# EAGLE board RN-52 Breakout-GiantPanel (EAGLE 6.4), part 1 of 5
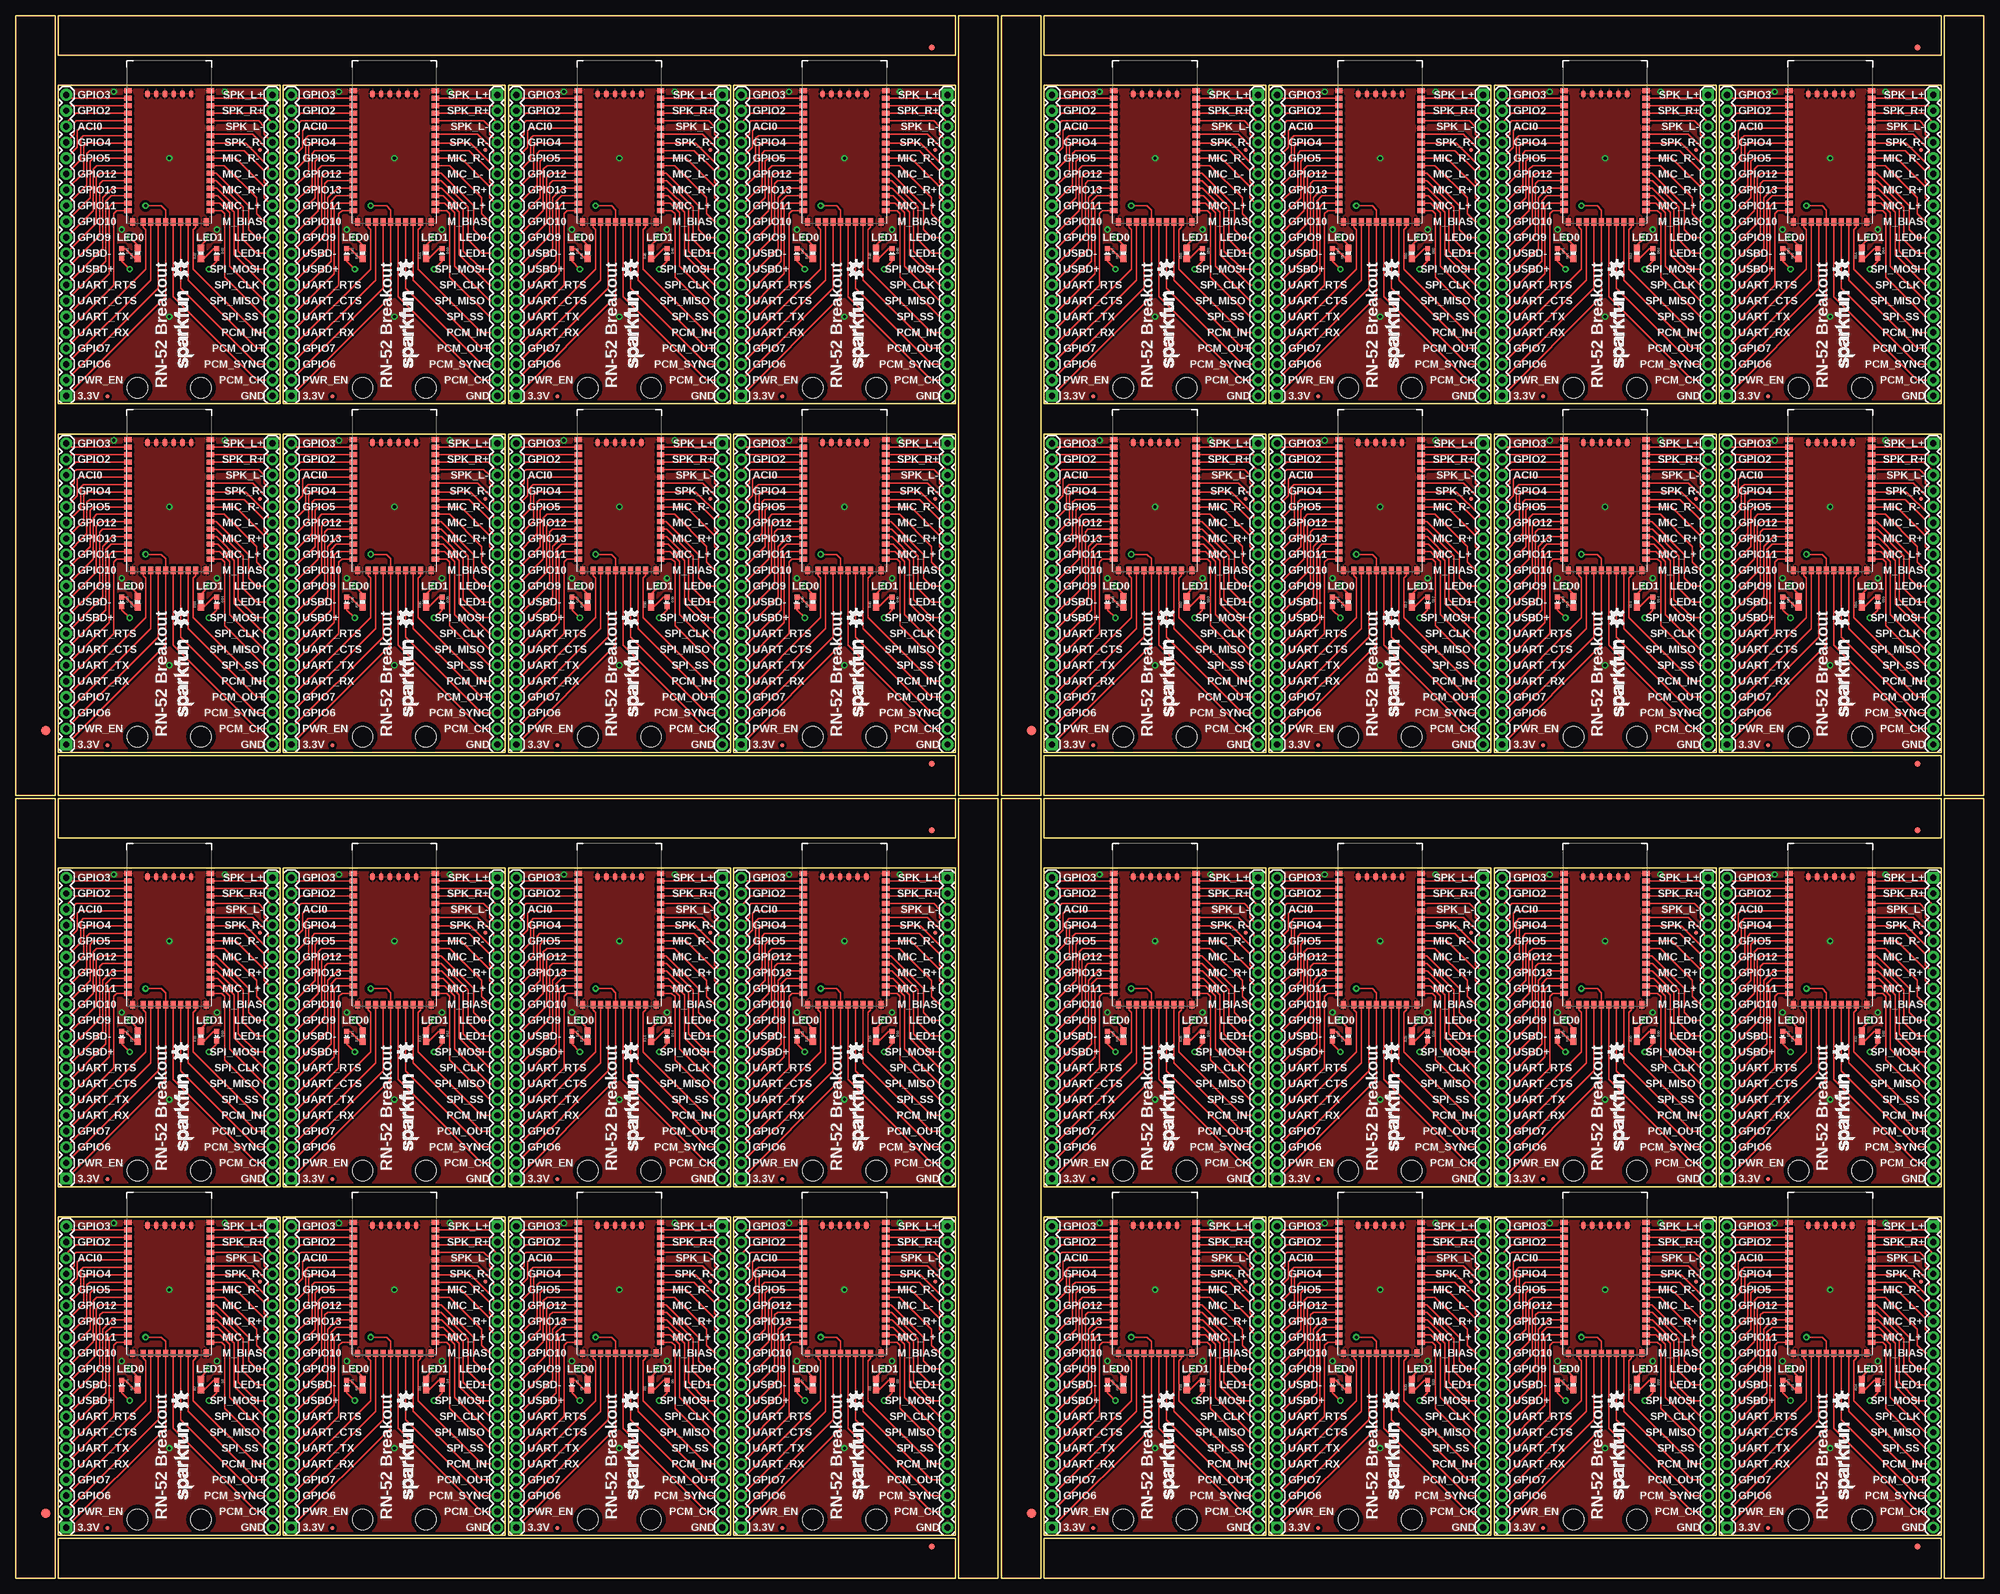
[diagram p0: board, top side]
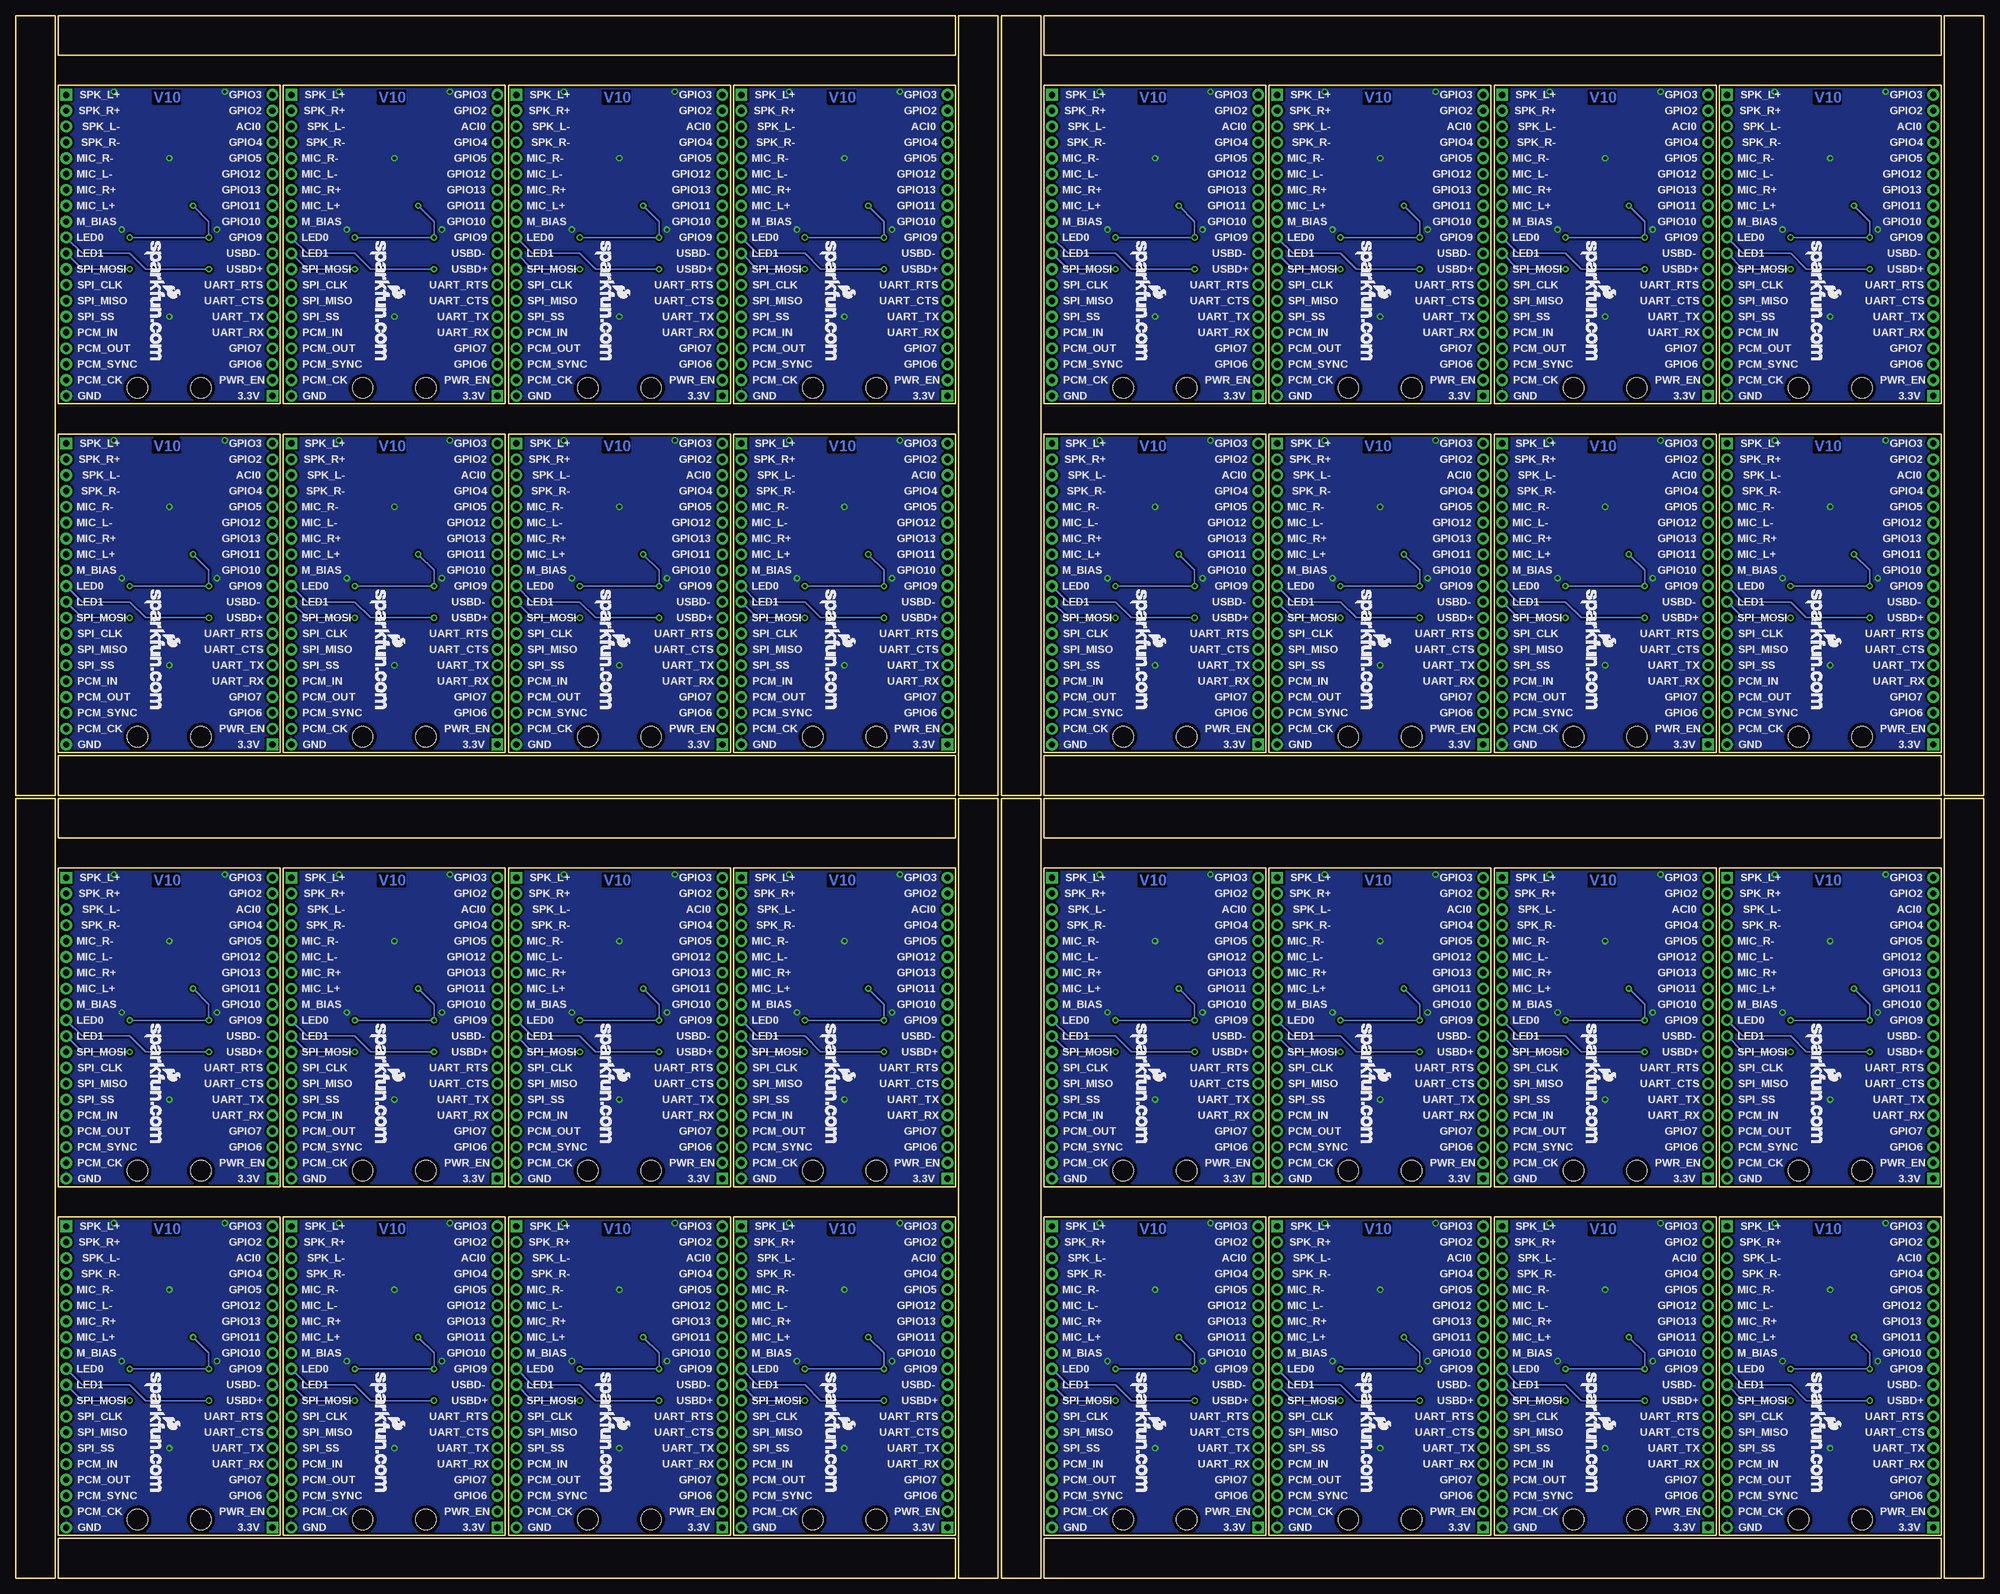
[diagram p1: board, bottom side, seen from below]

Size 315.47 x 250.44 mm. Coordinates in mm from the lower left corner, seen from the top.
Outline: 6.86,57.91 42.42,57.91 42.42,6.86 6.86,6.86 6.86,57.91
Outline: 42.93,57.91 78.49,57.91 78.49,6.86 42.93,6.86 42.93,57.91
Outline: 78.99,57.91 114.55,57.91 114.55,6.86 78.99,6.86 78.99,57.91
Outline: 115.06,57.91 150.62,57.91 150.62,6.86 115.06,6.86 115.06,57.91
Outline: 6.86,113.79 42.42,113.79 42.42,62.74 6.86,62.74 6.86,113.79
Outline: 42.93,113.79 78.49,113.79 78.49,62.74 42.93,62.74 42.93,113.79
Outline: 78.99,113.79 114.55,113.79 114.55,62.74 78.99,62.74 78.99,113.79
Outline: 115.06,113.79 150.62,113.79 150.62,62.74 115.06,62.74 115.06,113.79
Outline: 6.35,0 6.35,124.97 0,124.97 0,0 6.35,0
Outline: 6.86,0 150.62,0 150.62,6.35 6.86,6.35 6.86,0
Outline: 157.48,0 157.48,124.97 151.13,124.97 151.13,0 157.48,0
Outline: 6.86,118.62 150.62,118.62 150.62,124.97 6.86,124.97 6.86,118.62
Outline: 164.85,57.91 200.41,57.91 200.41,6.86 164.85,6.86 164.85,57.91
Outline: 200.91,57.91 236.47,57.91 236.47,6.86 200.91,6.86 200.91,57.91
Outline: 236.98,57.91 272.54,57.91 272.54,6.86 236.98,6.86 236.98,57.91
Outline: 273.05,57.91 308.61,57.91 308.61,6.86 273.05,6.86 273.05,57.91
Outline: 164.85,113.79 200.41,113.79 200.41,62.74 164.85,62.74 164.85,113.79
Outline: 200.91,113.79 236.47,113.79 236.47,62.74 200.91,62.74 200.91,113.79
Outline: 236.98,113.79 272.54,113.79 272.54,62.74 236.98,62.74 236.98,113.79
Outline: 273.05,113.79 308.61,113.79 308.61,62.74 273.05,62.74 273.05,113.79
Outline: 164.34,0 164.34,124.97 157.99,124.97 157.99,0 164.34,0
Outline: 164.85,0 308.61,0 308.61,6.35 164.85,6.35 164.85,0
Outline: 315.47,0 315.47,124.97 309.12,124.97 309.12,0 315.47,0
Outline: 164.85,118.62 308.61,118.62 308.61,124.97 164.85,124.97 164.85,118.62
Outline: 6.86,183.39 42.42,183.39 42.42,132.33 6.86,132.33 6.86,183.39
Outline: 42.93,183.39 78.49,183.39 78.49,132.33 42.93,132.33 42.93,183.39
Outline: 78.99,183.39 114.55,183.39 114.55,132.33 78.99,132.33 78.99,183.39
Outline: 115.06,183.39 150.62,183.39 150.62,132.33 115.06,132.33 115.06,183.39
Outline: 6.86,239.27 42.42,239.27 42.42,188.21 6.86,188.21 6.86,239.27
Outline: 42.93,239.27 78.49,239.27 78.49,188.21 42.93,188.21 42.93,239.27
Outline: 78.99,239.27 114.55,239.27 114.55,188.21 78.99,188.21 78.99,239.27
Outline: 115.06,239.27 150.62,239.27 150.62,188.21 115.06,188.21 115.06,239.27
Outline: 6.35,125.48 6.35,250.44 0,250.44 0,125.48 6.35,125.48
Outline: 6.86,125.48 150.62,125.48 150.62,131.83 6.86,131.83 6.86,125.48
Outline: 157.48,125.48 157.48,250.44 151.13,250.44 151.13,125.48 157.48,125.48
Outline: 6.86,244.09 150.62,244.09 150.62,250.44 6.86,250.44 6.86,244.09
Outline: 164.85,183.39 200.41,183.39 200.41,132.33 164.85,132.33 164.85,183.39
Outline: 200.91,183.39 236.47,183.39 236.47,132.33 200.91,132.33 200.91,183.39
Outline: 236.98,183.39 272.54,183.39 272.54,132.33 236.98,132.33 236.98,183.39
Outline: 273.05,183.39 308.61,183.39 308.61,132.33 273.05,132.33 273.05,183.39
Outline: 164.85,239.27 200.41,239.27 200.41,188.21 164.85,188.21 164.85,239.27
Outline: 200.91,239.27 236.47,239.27 236.47,188.21 200.91,188.21 200.91,239.27
Outline: 236.98,239.27 272.54,239.27 272.54,188.21 236.98,188.21 236.98,239.27
Outline: 273.05,239.27 308.61,239.27 308.61,188.21 273.05,188.21 273.05,239.27
Outline: 164.34,125.48 164.34,250.44 157.99,250.44 157.99,125.48 164.34,125.48
Outline: 164.85,125.48 308.61,125.48 308.61,131.83 164.85,131.83 164.85,125.48
Outline: 315.47,125.48 315.47,250.44 309.12,250.44 309.12,125.48 315.47,125.48
Outline: 164.85,244.09 308.61,244.09 308.61,250.44 164.85,250.44 164.85,244.09
Copper layers (1*16): Top 0.035mm / dielectric 1.5mm / Bottom 0.035mm
Design rules "default *": minimum track width 7mil, minimum drill 15mil, track to track 8mil, track to pad 8mil, pad to pad 8mil, via to via 8mil, smd to smd 8mil, copper to edge 8mil, drill to drill 8mil, minimum pad ring 12mil, minimum via ring 10mil, stop-mask expansion 4mil, vias tented up to drill 20mil, thermal gap 10mil

## Footprints (pad centres in the part's own frame; a part is rotated, then mirrored left to right if it is on the bottom)
LED-0603 = smd 0.8 x 0.8: A 0,-0.75; C 0,0.75
MICRO-FIDUCIAL = smd 0.635 x 0.635: 1 0,0
FIDUCIAL-1.5X3 = smd 1.5 x 1.5: 1 0,0
FIDUCIAL-1X2 = smd 1 x 1: 1 0,0
1X20 = drill 1.016 pad 1.88 square: 1 0,0 | drill 1.016 pad 1.88: 2 2.54,0; 3 5.08,0; 4 7.62,0; 5 10.16,0; 6 12.7,0; 7 15.24,0; 8 17.78,0; 9 20.32,0; 10 22.86,0; 11 25.4,0; 12 27.94,0; 13 30.48,0; 14 33.02,0; 15 35.56,0; 16 38.1,0; 17 40.64,0; 18 43.18,0; 19 45.72,0; 20 48.26,0
0603-RES = smd 1.1 x 1: 1 -0.85,0; 2 0.85,0
STAND-OFF = hole 3.302: 0,0
RN-52 = smd 1.2 x 0.8: 1 -6.6,8.33; 2 -6.6,7.13; 3 -6.6,5.93; 4 -6.6,4.73; 5 -6.6,3.53; 6 -6.6,2.33; 7 -6.6,1.13; 8 -6.6,-0.07; 9 -6.6,-1.27; 10 -6.6,-2.47; 11 -6.6,-3.67; 12 -6.6,-4.87; 13 -6.6,-6.07; 14 -6.6,-7.27; 15 -6.6,-8.47; 16 -6.6,-9.67; 25 6.6,-9.67; 26 6.6,-8.47; 27 6.6,-7.27; 28 6.6,-6.07; 29 6.6,-4.87; 30 6.6,-3.67; 31 6.6,-2.47; 32 6.6,-1.27; 33 6.6,-0.07; 34 6.6,1.13; 35 6.6,2.33; 36 6.6,3.53; 37 6.6,4.73; 38 6.6,5.93; 39 6.6,7.13; 40 6.6,8.33; G1 -6.6,9.53; G4 6.6,9.53 | smd 0.8 x 1.2: 17 -4.2,-11.47; 18 -3,-11.47; 19 -1.8,-11.47; 20 -0.6,-11.47; 21 0.6,-11.47; 22 1.8,-11.47; 23 3,-11.47; 24 4.2,-11.47; G2 -5.9,-11.47; G3 5.9,-11.46; RFG1 -3.5,9.03; RFG2 -2.1,9.03; RFG3 -0.7,9.03; RFG4 0.7,9.03; RFG5 2.1,9.03; RFG6 3.5,9.03

## Placement (x,y rotation side)
D1  GREEN  [LED-0603]  17.02,30.99 180 top
D2  RED  [LED-0603]  32.26,30.99 180 top
D3  GREEN  [LED-0603]  53.09,30.99 180 top
D4  RED  [LED-0603]  68.33,30.99 180 top
D5  GREEN  [LED-0603]  89.15,30.99 180 top
D6  RED  [LED-0603]  104.39,30.99 180 top
D7  GREEN  [LED-0603]  125.22,30.99 180 top
D8  RED  [LED-0603]  140.46,30.99 180 top
D9  GREEN  [LED-0603]  17.02,86.87 180 top
D10  RED  [LED-0603]  32.26,86.87 180 top
D11  GREEN  [LED-0603]  53.09,86.87 180 top
D12  RED  [LED-0603]  68.33,86.87 180 top
D13  GREEN  [LED-0603]  89.15,86.87 180 top
D14  RED  [LED-0603]  104.39,86.87 180 top
D15  GREEN  [LED-0603]  125.22,86.87 180 top
D16  RED  [LED-0603]  140.46,86.87 180 top
D17  GREEN  [LED-0603]  175.01,30.99 180 top
D18  RED  [LED-0603]  190.25,30.99 180 top
D19  GREEN  [LED-0603]  211.07,30.99 180 top
D20  RED  [LED-0603]  226.31,30.99 180 top
D21  GREEN  [LED-0603]  247.14,30.99 180 top
D22  RED  [LED-0603]  262.38,30.99 180 top
D23  GREEN  [LED-0603]  283.21,30.99 180 top
D24  RED  [LED-0603]  298.45,30.99 180 top
D25  GREEN  [LED-0603]  175.01,86.87 180 top
D26  RED  [LED-0603]  190.25,86.87 180 top
D27  GREEN  [LED-0603]  211.07,86.87 180 top
D28  RED  [LED-0603]  226.31,86.87 180 top
D29  GREEN  [LED-0603]  247.14,86.87 180 top
D30  RED  [LED-0603]  262.38,86.87 180 top
D31  GREEN  [LED-0603]  283.21,86.87 180 top
D32  RED  [LED-0603]  298.45,86.87 180 top
D33  GREEN  [LED-0603]  17.02,156.46 180 top
D34  RED  [LED-0603]  32.26,156.46 180 top
D35  GREEN  [LED-0603]  53.09,156.46 180 top
D36  RED  [LED-0603]  68.33,156.46 180 top
D37  GREEN  [LED-0603]  89.15,156.46 180 top
D38  RED  [LED-0603]  104.39,156.46 180 top
D39  GREEN  [LED-0603]  125.22,156.46 180 top
D40  RED  [LED-0603]  140.46,156.46 180 top
D41  GREEN  [LED-0603]  17.02,212.34 180 top
D42  RED  [LED-0603]  32.26,212.34 180 top
D43  GREEN  [LED-0603]  53.09,212.34 180 top
D44  RED  [LED-0603]  68.33,212.34 180 top
D45  GREEN  [LED-0603]  89.15,212.34 180 top
D46  RED  [LED-0603]  104.39,212.34 180 top
D47  GREEN  [LED-0603]  125.22,212.34 180 top
D48  RED  [LED-0603]  140.46,212.34 180 top
D49  GREEN  [LED-0603]  175.01,156.46 180 top
D50  RED  [LED-0603]  190.25,156.46 180 top
D51  GREEN  [LED-0603]  211.07,156.46 180 top
D52  RED  [LED-0603]  226.31,156.46 180 top
D53  GREEN  [LED-0603]  247.14,156.46 180 top
D54  RED  [LED-0603]  262.38,156.46 180 top
D55  GREEN  [LED-0603]  283.21,156.46 180 top
D56  RED  [LED-0603]  298.45,156.46 180 top
D57  GREEN  [LED-0603]  175.01,212.34 180 top
D58  RED  [LED-0603]  190.25,212.34 180 top
D59  GREEN  [LED-0603]  211.07,212.34 180 top
D60  RED  [LED-0603]  226.31,212.34 180 top
D61  GREEN  [LED-0603]  247.14,212.34 180 top
D62  RED  [LED-0603]  262.38,212.34 180 top
D63  GREEN  [LED-0603]  283.21,212.34 180 top
D64  RED  [LED-0603]  298.45,212.34 180 top
E$1  [MICRO-FIDUCIAL]  14.71,8.05 0 top
E$2  [MICRO-FIDUCIAL]  39.19,47.55 0 top
E$3  [MICRO-FIDUCIAL]  50.77,8.05 0 top
E$4  [MICRO-FIDUCIAL]  75.26,47.55 0 top
E$5  [MICRO-FIDUCIAL]  86.84,8.05 0 top
E$6  [MICRO-FIDUCIAL]  111.33,47.55 0 top
E$7  [MICRO-FIDUCIAL]  122.91,8.05 0 top
E$8  [MICRO-FIDUCIAL]  147.4,47.55 0 top
E$9  [MICRO-FIDUCIAL]  14.71,63.93 0 top
E$10  [MICRO-FIDUCIAL]  39.19,103.43 0 top
E$11  [MICRO-FIDUCIAL]  50.77,63.93 0 top
E$12  [MICRO-FIDUCIAL]  75.26,103.43 0 top
E$13  [MICRO-FIDUCIAL]  86.84,63.93 0 top
E$14  [MICRO-FIDUCIAL]  111.33,103.43 0 top
E$15  [MICRO-FIDUCIAL]  122.91,63.93 0 top
E$16  [MICRO-FIDUCIAL]  147.4,103.43 0 top
E$17  [FIDUCIAL-1.5X3]  4.83,10.41 0 top
E$18  [MICRO-FIDUCIAL]  172.69,8.05 0 top
E$19  [FIDUCIAL-1X2]  146.81,5.08 90 top
E$20  [MICRO-FIDUCIAL]  197.18,47.55 0 top
E$21  [MICRO-FIDUCIAL]  208.76,8.05 0 top
E$22  [MICRO-FIDUCIAL]  233.25,47.55 0 top
E$23  [MICRO-FIDUCIAL]  244.83,8.05 0 top
E$24  [FIDUCIAL-1X2]  146.81,119.89 90 top
E$25  [MICRO-FIDUCIAL]  269.32,47.55 0 top
E$26  [MICRO-FIDUCIAL]  280.9,8.05 0 top
E$27  [MICRO-FIDUCIAL]  305.38,47.55 0 top
E$28  [MICRO-FIDUCIAL]  172.69,63.93 0 top
E$29  [MICRO-FIDUCIAL]  197.18,103.43 0 top
E$30  [MICRO-FIDUCIAL]  208.76,63.93 0 top
E$31  [MICRO-FIDUCIAL]  233.25,103.43 0 top
E$32  [MICRO-FIDUCIAL]  244.83,63.93 0 top
E$33  [MICRO-FIDUCIAL]  269.32,103.43 0 top
E$34  [MICRO-FIDUCIAL]  280.9,63.93 0 top
E$35  [MICRO-FIDUCIAL]  305.38,103.43 0 top
E$36  [FIDUCIAL-1X2]  304.8,5.08 90 top
E$37  [FIDUCIAL-1X2]  304.8,119.89 90 top
E$38  [FIDUCIAL-1.5X3]  162.81,10.41 0 top
E$39  [MICRO-FIDUCIAL]  14.71,133.53 0 top
E$40  [MICRO-FIDUCIAL]  39.19,173.02 0 top
E$41  [MICRO-FIDUCIAL]  50.77,133.53 0 top
E$42  [MICRO-FIDUCIAL]  75.26,173.02 0 top
E$43  [MICRO-FIDUCIAL]  86.84,133.53 0 top
E$44  [MICRO-FIDUCIAL]  111.33,173.02 0 top
E$45  [MICRO-FIDUCIAL]  122.91,133.53 0 top
E$46  [MICRO-FIDUCIAL]  147.4,173.02 0 top
E$47  [MICRO-FIDUCIAL]  14.71,189.41 0 top
E$48  [MICRO-FIDUCIAL]  39.19,228.9 0 top
E$49  [MICRO-FIDUCIAL]  50.77,189.41 0 top
E$50  [MICRO-FIDUCIAL]  75.26,228.9 0 top
E$51  [MICRO-FIDUCIAL]  86.84,189.41 0 top
E$52  [MICRO-FIDUCIAL]  111.33,228.9 0 top
E$53  [MICRO-FIDUCIAL]  122.91,189.41 0 top
E$54  [MICRO-FIDUCIAL]  147.4,228.9 0 top
E$55  [FIDUCIAL-1X2]  146.81,130.56 90 top
E$56  [FIDUCIAL-1X2]  146.81,245.36 90 top
E$57  [FIDUCIAL-1.5X3]  4.83,135.89 0 top
E$58  [MICRO-FIDUCIAL]  172.69,133.53 0 top
E$59  [MICRO-FIDUCIAL]  197.18,173.02 0 top
E$60  [MICRO-FIDUCIAL]  208.76,133.53 0 top
E$61  [MICRO-FIDUCIAL]  233.25,173.02 0 top
E$62  [MICRO-FIDUCIAL]  244.83,133.53 0 top
E$63  [MICRO-FIDUCIAL]  269.32,173.02 0 top
E$64  [MICRO-FIDUCIAL]  280.9,133.53 0 top
E$65  [MICRO-FIDUCIAL]  305.38,173.02 0 top
E$66  [MICRO-FIDUCIAL]  172.69,189.41 0 top
E$67  [MICRO-FIDUCIAL]  197.18,228.9 0 top
E$68  [MICRO-FIDUCIAL]  208.76,189.41 0 top
E$69  [MICRO-FIDUCIAL]  233.25,228.9 0 top
E$70  [MICRO-FIDUCIAL]  244.83,189.41 0 top
E$71  [MICRO-FIDUCIAL]  269.32,228.9 0 top
E$72  [MICRO-FIDUCIAL]  280.9,189.41 0 top
E$73  [MICRO-FIDUCIAL]  305.38,228.9 0 top
E$74  [FIDUCIAL-1X2]  304.8,130.56 90 top
E$75  [FIDUCIAL-1X2]  304.8,245.36 90 top
E$76  [FIDUCIAL-1.5X3]  162.81,135.89 0 top
JP1  M20  [1X20]  8.13,8.13 90 top
JP2  M20  [1X20]  41.15,56.39 270 top
JP3  M20  [1X20]  44.2,8.13 90 top
JP4  M20  [1X20]  77.22,56.39 270 top
JP5  M20  [1X20]  80.26,8.13 90 top
JP6  M20  [1X20]  113.28,56.39 270 top
JP7  M20  [1X20]  116.33,8.13 90 top
JP8  M20  [1X20]  149.35,56.39 270 top
JP9  M20  [1X20]  8.13,64.01 90 top
JP10  M20  [1X20]  41.15,112.27 270 top
JP11  M20  [1X20]  44.2,64.01 90 top
JP12  M20  [1X20]  77.22,112.27 270 top
JP13  M20  [1X20]  80.26,64.01 90 top
JP14  M20  [1X20]  113.28,112.27 270 top
JP15  M20  [1X20]  116.33,64.01 90 top
JP16  M20  [1X20]  149.35,112.27 270 top
JP17  M20  [1X20]  166.12,8.13 90 top
JP18  M20  [1X20]  199.14,56.39 270 top
JP19  M20  [1X20]  202.18,8.13 90 top
JP20  M20  [1X20]  235.2,56.39 270 top
JP21  M20  [1X20]  238.25,8.13 90 top
JP22  M20  [1X20]  271.27,56.39 270 top
JP23  M20  [1X20]  274.32,8.13 90 top
JP24  M20  [1X20]  307.34,56.39 270 top
JP25  M20  [1X20]  166.12,64.01 90 top
JP26  M20  [1X20]  199.14,112.27 270 top
JP27  M20  [1X20]  202.18,64.01 90 top
JP28  M20  [1X20]  235.2,112.27 270 top
JP29  M20  [1X20]  238.25,64.01 90 top
JP30  M20  [1X20]  271.27,112.27 270 top
JP31  M20  [1X20]  274.32,64.01 90 top
JP32  M20  [1X20]  307.34,112.27 270 top
JP33  M20  [1X20]  8.13,133.6 90 top
JP34  M20  [1X20]  41.15,181.86 270 top
JP35  M20  [1X20]  44.2,133.6 90 top
JP36  M20  [1X20]  77.22,181.86 270 top
JP37  M20  [1X20]  80.26,133.6 90 top
JP38  M20  [1X20]  113.28,181.86 270 top
JP39  M20  [1X20]  116.33,133.6 90 top
JP40  M20  [1X20]  149.35,181.86 270 top
JP41  M20  [1X20]  8.13,189.48 90 top
JP42  M20  [1X20]  41.15,237.74 270 top
JP43  M20  [1X20]  44.2,189.48 90 top
JP44  M20  [1X20]  77.22,237.74 270 top
JP45  M20  [1X20]  80.26,189.48 90 top
JP46  M20  [1X20]  113.28,237.74 270 top
JP47  M20  [1X20]  116.33,189.48 90 top
JP48  M20  [1X20]  149.35,237.74 270 top
JP49  M20  [1X20]  166.12,133.6 90 top
JP50  M20  [1X20]  199.14,181.86 270 top
JP51  M20  [1X20]  202.18,133.6 90 top
JP52  M20  [1X20]  235.2,181.86 270 top
JP53  M20  [1X20]  238.25,133.6 90 top
JP54  M20  [1X20]  271.27,181.86 270 top
JP55  M20  [1X20]  274.32,133.6 90 top
JP56  M20  [1X20]  307.34,181.86 270 top
JP57  M20  [1X20]  166.12,189.48 90 top
JP58  M20  [1X20]  199.14,237.74 270 top
JP59  M20  [1X20]  202.18,189.48 90 top
JP60  M20  [1X20]  235.2,237.74 270 top
JP61  M20  [1X20]  238.25,189.48 90 top
JP62  M20  [1X20]  271.27,237.74 270 top
JP63  M20  [1X20]  274.32,189.48 90 top
JP64  M20  [1X20]  307.34,237.74 270 top
LOGO1  OSHW-LOGOS  [OSHW-LOGO-S]  26.54,28.45 90 top
LOGO2  OSHW-LOGOS  [OSHW-LOGO-S]  62.61,28.45 90 top
LOGO3  LOGO-SFENEW  [SFE-NEW-WEBLOGO]  28.57,32.89 270 bottom
LOGO4  LOGO-SFENW2  [SFE-NEW-WEB]  28.57,12.7 90 top
LOGO5  LOGO-SFENEW  [SFE-NEW-WEBLOGO]  64.64,32.89 270 bottom
LOGO6  LOGO-SFENW2  [SFE-NEW-WEB]  64.64,12.7 90 top
LOGO7  OSHW-LOGOS  [OSHW-LOGO-S]  98.68,28.45 90 top
LOGO8  LOGO-SFENEW  [SFE-NEW-WEBLOGO]  100.71,32.89 270 bottom
LOGO9  LOGO-SFENW2  [SFE-NEW-WEB]  100.71,12.7 90 top
LOGO10  OSHW-LOGOS  [OSHW-LOGO-S]  134.75,28.45 90 top
LOGO11  LOGO-SFENEW  [SFE-NEW-WEBLOGO]  136.78,32.89 270 bottom
LOGO12  LOGO-SFENW2  [SFE-NEW-WEB]  136.78,12.7 90 top
LOGO13  OSHW-LOGOS  [OSHW-LOGO-S]  26.54,84.33 90 top
LOGO14  LOGO-SFENEW  [SFE-NEW-WEBLOGO]  28.57,88.77 270 bottom
LOGO15  LOGO-SFENW2  [SFE-NEW-WEB]  28.57,68.58 90 top
LOGO16  OSHW-LOGOS  [OSHW-LOGO-S]  62.61,84.33 90 top
LOGO17  LOGO-SFENEW  [SFE-NEW-WEBLOGO]  64.64,88.77 270 bottom
LOGO18  LOGO-SFENW2  [SFE-NEW-WEB]  64.64,68.58 90 top
LOGO19  OSHW-LOGOS  [OSHW-LOGO-S]  98.68,84.33 90 top
LOGO20  LOGO-SFENEW  [SFE-NEW-WEBLOGO]  100.71,88.77 270 bottom
LOGO21  LOGO-SFENW2  [SFE-NEW-WEB]  100.71,68.58 90 top
LOGO22  OSHW-LOGOS  [OSHW-LOGO-S]  134.75,84.33 90 top
LOGO23  LOGO-SFENEW  [SFE-NEW-WEBLOGO]  136.78,88.77 270 bottom
LOGO24  LOGO-SFENW2  [SFE-NEW-WEB]  136.78,68.58 90 top
LOGO25  OSHW-LOGOS  [OSHW-LOGO-S]  184.53,28.45 90 top
LOGO26  LOGO-SFENEW  [SFE-NEW-WEBLOGO]  186.56,32.89 270 bottom
LOGO27  LOGO-SFENW2  [SFE-NEW-WEB]  186.56,12.7 90 top
LOGO28  OSHW-LOGOS  [OSHW-LOGO-S]  220.6,28.45 90 top
LOGO29  LOGO-SFENEW  [SFE-NEW-WEBLOGO]  222.63,32.89 270 bottom
LOGO30  LOGO-SFENW2  [SFE-NEW-WEB]  222.63,12.7 90 top
LOGO31  OSHW-LOGOS  [OSHW-LOGO-S]  256.67,28.45 90 top
LOGO32  LOGO-SFENEW  [SFE-NEW-WEBLOGO]  258.7,32.89 270 bottom
LOGO33  LOGO-SFENW2  [SFE-NEW-WEB]  258.7,12.7 90 top
LOGO34  OSHW-LOGOS  [OSHW-LOGO-S]  292.74,28.45 90 top
LOGO35  LOGO-SFENEW  [SFE-NEW-WEBLOGO]  294.77,32.89 270 bottom
LOGO36  LOGO-SFENW2  [SFE-NEW-WEB]  294.77,12.7 90 top
LOGO37  OSHW-LOGOS  [OSHW-LOGO-S]  184.53,84.33 90 top
LOGO38  LOGO-SFENEW  [SFE-NEW-WEBLOGO]  186.56,88.77 270 bottom
LOGO39  LOGO-SFENW2  [SFE-NEW-WEB]  186.56,68.58 90 top
LOGO40  OSHW-LOGOS  [OSHW-LOGO-S]  220.6,84.33 90 top
LOGO41  LOGO-SFENEW  [SFE-NEW-WEBLOGO]  222.63,88.77 270 bottom
LOGO42  LOGO-SFENW2  [SFE-NEW-WEB]  222.63,68.58 90 top
LOGO43  OSHW-LOGOS  [OSHW-LOGO-S]  256.67,84.33 90 top
LOGO44  LOGO-SFENEW  [SFE-NEW-WEBLOGO]  258.7,88.77 270 bottom
LOGO45  LOGO-SFENW2  [SFE-NEW-WEB]  258.7,68.58 90 top
LOGO46  OSHW-LOGOS  [OSHW-LOGO-S]  292.74,84.33 90 top
LOGO47  LOGO-SFENEW  [SFE-NEW-WEBLOGO]  294.77,88.77 270 bottom
LOGO48  LOGO-SFENW2  [SFE-NEW-WEB]  294.77,68.58 90 top
LOGO49  OSHW-LOGOS  [OSHW-LOGO-S]  26.54,153.92 90 top
LOGO50  LOGO-SFENEW  [SFE-NEW-WEBLOGO]  28.57,158.37 270 bottom
LOGO51  LOGO-SFENW2  [SFE-NEW-WEB]  28.57,138.18 90 top
LOGO52  OSHW-LOGOS  [OSHW-LOGO-S]  62.61,153.92 90 top
LOGO53  LOGO-SFENEW  [SFE-NEW-WEBLOGO]  64.64,158.37 270 bottom
LOGO54  LOGO-SFENW2  [SFE-NEW-WEB]  64.64,138.18 90 top
LOGO55  OSHW-LOGOS  [OSHW-LOGO-S]  98.68,153.92 90 top
LOGO56  LOGO-SFENEW  [SFE-NEW-WEBLOGO]  100.71,158.37 270 bottom
LOGO57  LOGO-SFENW2  [SFE-NEW-WEB]  100.71,138.18 90 top
LOGO58  OSHW-LOGOS  [OSHW-LOGO-S]  134.75,153.92 90 top
LOGO59  LOGO-SFENEW  [SFE-NEW-WEBLOGO]  136.78,158.37 270 bottom
LOGO60  LOGO-SFENW2  [SFE-NEW-WEB]  136.78,138.18 90 top
LOGO61  OSHW-LOGOS  [OSHW-LOGO-S]  26.54,209.8 90 top
LOGO62  LOGO-SFENEW  [SFE-NEW-WEBLOGO]  28.57,214.25 270 bottom
LOGO63  LOGO-SFENW2  [SFE-NEW-WEB]  28.57,194.06 90 top
LOGO64  OSHW-LOGOS  [OSHW-LOGO-S]  62.61,209.8 90 top
LOGO65  LOGO-SFENEW  [SFE-NEW-WEBLOGO]  64.64,214.25 270 bottom
LOGO66  LOGO-SFENW2  [SFE-NEW-WEB]  64.64,194.06 90 top
LOGO67  OSHW-LOGOS  [OSHW-LOGO-S]  98.68,209.8 90 top
LOGO68  LOGO-SFENEW  [SFE-NEW-WEBLOGO]  100.71,214.25 270 bottom
LOGO69  LOGO-SFENW2  [SFE-NEW-WEB]  100.71,194.06 90 top
LOGO70  OSHW-LOGOS  [OSHW-LOGO-S]  134.75,209.8 90 top
LOGO71  LOGO-SFENEW  [SFE-NEW-WEBLOGO]  136.78,214.25 270 bottom
LOGO72  LOGO-SFENW2  [SFE-NEW-WEB]  136.78,194.06 90 top
LOGO73  OSHW-LOGOS  [OSHW-LOGO-S]  184.53,153.92 90 top
LOGO74  LOGO-SFENEW  [SFE-NEW-WEBLOGO]  186.56,158.37 270 bottom
LOGO75  LOGO-SFENW2  [SFE-NEW-WEB]  186.56,138.18 90 top
LOGO76  OSHW-LOGOS  [OSHW-LOGO-S]  220.6,153.92 90 top
LOGO77  LOGO-SFENEW  [SFE-NEW-WEBLOGO]  222.63,158.37 270 bottom
LOGO78  LOGO-SFENW2  [SFE-NEW-WEB]  222.63,138.18 90 top
LOGO79  OSHW-LOGOS  [OSHW-LOGO-S]  256.67,153.92 90 top
LOGO80  LOGO-SFENEW  [SFE-NEW-WEBLOGO]  258.7,158.37 270 bottom
LOGO81  LOGO-SFENW2  [SFE-NEW-WEB]  258.7,138.18 90 top
LOGO82  OSHW-LOGOS  [OSHW-LOGO-S]  292.74,153.92 90 top
LOGO83  LOGO-SFENEW  [SFE-NEW-WEBLOGO]  294.77,158.37 270 bottom
LOGO84  LOGO-SFENW2  [SFE-NEW-WEB]  294.77,138.18 90 top
LOGO85  OSHW-LOGOS  [OSHW-LOGO-S]  184.53,209.8 90 top
LOGO86  LOGO-SFENEW  [SFE-NEW-WEBLOGO]  186.56,214.25 270 bottom
LOGO87  LOGO-SFENW2  [SFE-NEW-WEB]  186.56,194.06 90 top
LOGO88  OSHW-LOGOS  [OSHW-LOGO-S]  220.6,209.8 90 top
LOGO89  LOGO-SFENEW  [SFE-NEW-WEBLOGO]  222.63,214.25 270 bottom
LOGO90  LOGO-SFENW2  [SFE-NEW-WEB]  222.63,194.06 90 top
LOGO91  OSHW-LOGOS  [OSHW-LOGO-S]  256.67,209.8 90 top
LOGO92  LOGO-SFENEW  [SFE-NEW-WEBLOGO]  258.7,214.25 270 bottom
LOGO93  LOGO-SFENW2  [SFE-NEW-WEB]  258.7,194.06 90 top
LOGO94  OSHW-LOGOS  [OSHW-LOGO-S]  292.74,209.8 90 top
LOGO95  LOGO-SFENEW  [SFE-NEW-WEBLOGO]  294.77,214.25 270 bottom
LOGO96  LOGO-SFENW2  [SFE-NEW-WEB]  294.77,194.06 90 top
R1  330  [0603-RES]  19.56,30.99 90 top
R2  330  [0603-RES]  29.72,30.99 90 top
R3  330  [0603-RES]  55.63,30.99 90 top
R4  330  [0603-RES]  65.79,30.99 90 top
R5  330  [0603-RES]  91.69,30.99 90 top
R6  330  [0603-RES]  101.85,30.99 90 top
R7  330  [0603-RES]  127.76,30.99 90 top
R8  330  [0603-RES]  137.92,30.99 90 top
R9  330  [0603-RES]  19.56,86.87 90 top
R10  330  [0603-RES]  29.72,86.87 90 top
R11  330  [0603-RES]  55.63,86.87 90 top
R12  330  [0603-RES]  65.79,86.87 90 top
R13  330  [0603-RES]  91.69,86.87 90 top
R14  330  [0603-RES]  101.85,86.87 90 top
R15  330  [0603-RES]  127.76,86.87 90 top
R16  330  [0603-RES]  137.92,86.87 90 top
R17  330  [0603-RES]  177.55,30.99 90 top
R18  330  [0603-RES]  187.71,30.99 90 top
R19  330  [0603-RES]  213.61,30.99 90 top
R20  330  [0603-RES]  223.77,30.99 90 top
R21  330  [0603-RES]  249.68,30.99 90 top
R22  330  [0603-RES]  259.84,30.99 90 top
R23  330  [0603-RES]  285.75,30.99 90 top
R24  330  [0603-RES]  295.91,30.99 90 top
R25  330  [0603-RES]  177.55,86.87 90 top
R26  330  [0603-RES]  187.71,86.87 90 top
R27  330  [0603-RES]  213.61,86.87 90 top
R28  330  [0603-RES]  223.77,86.87 90 top
R29  330  [0603-RES]  249.68,86.87 90 top
R30  330  [0603-RES]  259.84,86.87 90 top
R31  330  [0603-RES]  285.75,86.87 90 top
R32  330  [0603-RES]  295.91,86.87 90 top
R33  330  [0603-RES]  19.56,156.46 90 top
R34  330  [0603-RES]  29.72,156.46 90 top
R35  330  [0603-RES]  55.63,156.46 90 top
R36  330  [0603-RES]  65.79,156.46 90 top
R37  330  [0603-RES]  91.69,156.46 90 top
R38  330  [0603-RES]  101.85,156.46 90 top
R39  330  [0603-RES]  127.76,156.46 90 top
R40  330  [0603-RES]  137.92,156.46 90 top
R41  330  [0603-RES]  19.56,212.34 90 top
R42  330  [0603-RES]  29.72,212.34 90 top
R43  330  [0603-RES]  55.63,212.34 90 top
R44  330  [0603-RES]  65.79,212.34 90 top
R45  330  [0603-RES]  91.69,212.34 90 top
R46  330  [0603-RES]  101.85,212.34 90 top
R47  330  [0603-RES]  127.76,212.34 90 top
R48  330  [0603-RES]  137.92,212.34 90 top
R49  330  [0603-RES]  177.55,156.46 90 top
R50  330  [0603-RES]  187.71,156.46 90 top
R51  330  [0603-RES]  213.61,156.46 90 top
R52  330  [0603-RES]  223.77,156.46 90 top
R53  330  [0603-RES]  249.68,156.46 90 top
R54  330  [0603-RES]  259.84,156.46 90 top
R55  330  [0603-RES]  285.75,156.46 90 top
R56  330  [0603-RES]  295.91,156.46 90 top
R57  330  [0603-RES]  177.55,212.34 90 top
R58  330  [0603-RES]  187.71,212.34 90 top
R59  330  [0603-RES]  213.61,212.34 90 top
R60  330  [0603-RES]  223.77,212.34 90 top
R61  330  [0603-RES]  249.68,212.34 90 top
R62  330  [0603-RES]  259.84,212.34 90 top
R63  330  [0603-RES]  285.75,212.34 90 top
R64  330  [0603-RES]  295.91,212.34 90 top
STANDOFF1  STAND-OFF  [STAND-OFF]  19.56,9.4 0 top
STANDOFF2  STAND-OFF  [STAND-OFF]  29.72,9.4 0 top
STANDOFF3  STAND-OFF  [STAND-OFF]  55.63,9.4 0 top
STANDOFF4  STAND-OFF  [STAND-OFF]  65.79,9.4 0 top
STANDOFF5  STAND-OFF  [STAND-OFF]  91.69,9.4 0 top
STANDOFF6  STAND-OFF  [STAND-OFF]  101.85,9.4 0 top
STANDOFF7  STAND-OFF  [STAND-OFF]  127.76,9.4 0 top
STANDOFF8  STAND-OFF  [STAND-OFF]  137.92,9.4 0 top
STANDOFF9  STAND-OFF  [STAND-OFF]  19.56,65.28 0 top
STANDOFF10  STAND-OFF  [STAND-OFF]  29.72,65.28 0 top
STANDOFF11  STAND-OFF  [STAND-OFF]  55.63,65.28 0 top
STANDOFF12  STAND-OFF  [STAND-OFF]  65.79,65.28 0 top
STANDOFF13  STAND-OFF  [STAND-OFF]  91.69,65.28 0 top
STANDOFF14  STAND-OFF  [STAND-OFF]  101.85,65.28 0 top
STANDOFF15  STAND-OFF  [STAND-OFF]  127.76,65.28 0 top
STANDOFF16  STAND-OFF  [STAND-OFF]  137.92,65.28 0 top
STANDOFF17  STAND-OFF  [STAND-OFF]  177.55,9.4 0 top
STANDOFF18  STAND-OFF  [STAND-OFF]  187.71,9.4 0 top
STANDOFF19  STAND-OFF  [STAND-OFF]  213.61,9.4 0 top
STANDOFF20  STAND-OFF  [STAND-OFF]  223.77,9.4 0 top
STANDOFF21  STAND-OFF  [STAND-OFF]  249.68,9.4 0 top
STANDOFF22  STAND-OFF  [STAND-OFF]  259.84,9.4 0 top
STANDOFF23  STAND-OFF  [STAND-OFF]  285.75,9.4 0 top
STANDOFF24  STAND-OFF  [STAND-OFF]  295.91,9.4 0 top
STANDOFF25  STAND-OFF  [STAND-OFF]  177.55,65.28 0 top
STANDOFF26  STAND-OFF  [STAND-OFF]  187.71,65.28 0 top
STANDOFF27  STAND-OFF  [STAND-OFF]  213.61,65.28 0 top
STANDOFF28  STAND-OFF  [STAND-OFF]  223.77,65.28 0 top
STANDOFF29  STAND-OFF  [STAND-OFF]  249.68,65.28 0 top
STANDOFF30  STAND-OFF  [STAND-OFF]  259.84,65.28 0 top
STANDOFF31  STAND-OFF  [STAND-OFF]  285.75,65.28 0 top
STANDOFF32  STAND-OFF  [STAND-OFF]  295.91,65.28 0 top
STANDOFF33  STAND-OFF  [STAND-OFF]  19.56,134.87 0 top
STANDOFF34  STAND-OFF  [STAND-OFF]  29.72,134.87 0 top
STANDOFF35  STAND-OFF  [STAND-OFF]  55.63,134.87 0 top
STANDOFF36  STAND-OFF  [STAND-OFF]  65.79,134.87 0 top
STANDOFF37  STAND-OFF  [STAND-OFF]  91.69,134.87 0 top
STANDOFF38  STAND-OFF  [STAND-OFF]  101.85,134.87 0 top
STANDOFF39  STAND-OFF  [STAND-OFF]  127.76,134.87 0 top
STANDOFF40  STAND-OFF  [STAND-OFF]  137.92,134.87 0 top
STANDOFF41  STAND-OFF  [STAND-OFF]  19.56,190.75 0 top
STANDOFF42  STAND-OFF  [STAND-OFF]  29.72,190.75 0 top
STANDOFF43  STAND-OFF  [STAND-OFF]  55.63,190.75 0 top
STANDOFF44  STAND-OFF  [STAND-OFF]  65.79,190.75 0 top
STANDOFF45  STAND-OFF  [STAND-OFF]  91.69,190.75 0 top
STANDOFF46  STAND-OFF  [STAND-OFF]  101.85,190.75 0 top
STANDOFF47  STAND-OFF  [STAND-OFF]  127.76,190.75 0 top
STANDOFF48  STAND-OFF  [STAND-OFF]  137.92,190.75 0 top
STANDOFF49  STAND-OFF  [STAND-OFF]  177.55,134.87 0 top
STANDOFF50  STAND-OFF  [STAND-OFF]  187.71,134.87 0 top
STANDOFF51  STAND-OFF  [STAND-OFF]  213.61,134.87 0 top
STANDOFF52  STAND-OFF  [STAND-OFF]  223.77,134.87 0 top
STANDOFF53  STAND-OFF  [STAND-OFF]  249.68,134.87 0 top
STANDOFF54  STAND-OFF  [STAND-OFF]  259.84,134.87 0 top
STANDOFF55  STAND-OFF  [STAND-OFF]  285.75,134.87 0 top
STANDOFF56  STAND-OFF  [STAND-OFF]  295.91,134.87 0 top
STANDOFF57  STAND-OFF  [STAND-OFF]  177.55,190.75 0 top
STANDOFF58  STAND-OFF  [STAND-OFF]  187.71,190.75 0 top
STANDOFF59  STAND-OFF  [STAND-OFF]  213.61,190.75 0 top
STANDOFF60  STAND-OFF  [STAND-OFF]  223.77,190.75 0 top
STANDOFF61  STAND-OFF  [STAND-OFF]  249.68,190.75 0 top
STANDOFF62  STAND-OFF  [STAND-OFF]  259.84,190.75 0 top
STANDOFF63  STAND-OFF  [STAND-OFF]  285.75,190.75 0 top
STANDOFF64  STAND-OFF  [STAND-OFF]  295.91,190.75 0 top
U1  BLUETOOTH-RN-52  [RN-52]  24.64,47.5 0 top
U2  BLUETOOTH-RN-52  [RN-52]  60.71,47.5 0 top
U3  BLUETOOTH-RN-52  [RN-52]  96.77,47.5 0 top
U4  BLUETOOTH-RN-52  [RN-52]  132.84,47.5 0 top
U5  BLUETOOTH-RN-52  [RN-52]  24.64,103.38 0 top
U6  BLUETOOTH-RN-52  [RN-52]  60.71,103.38 0 top
U7  BLUETOOTH-RN-52  [RN-52]  96.77,103.38 0 top
U8  BLUETOOTH-RN-52  [RN-52]  132.84,103.38 0 top
U9  BLUETOOTH-RN-52  [RN-52]  182.63,47.5 0 top
U10  BLUETOOTH-RN-52  [RN-52]  218.69,47.5 0 top
U11  BLUETOOTH-RN-52  [RN-52]  254.76,47.5 0 top
U12  BLUETOOTH-RN-52  [RN-52]  290.83,47.5 0 top
U13  BLUETOOTH-RN-52  [RN-52]  182.63,103.38 0 top
U14  BLUETOOTH-RN-52  [RN-52]  218.69,103.38 0 top
U15  BLUETOOTH-RN-52  [RN-52]  254.76,103.38 0 top
U16  BLUETOOTH-RN-52  [RN-52]  290.83,103.38 0 top
U17  BLUETOOTH-RN-52  [RN-52]  24.64,172.97 0 top
U18  BLUETOOTH-RN-52  [RN-52]  60.71,172.97 0 top
U19  BLUETOOTH-RN-52  [RN-52]  96.77,172.97 0 top
U20  BLUETOOTH-RN-52  [RN-52]  132.84,172.97 0 top
U21  BLUETOOTH-RN-52  [RN-52]  24.64,228.85 0 top
U22  BLUETOOTH-RN-52  [RN-52]  60.71,228.85 0 top
U23  BLUETOOTH-RN-52  [RN-52]  96.77,228.85 0 top
U24  BLUETOOTH-RN-52  [RN-52]  132.84,228.85 0 top
U25  BLUETOOTH-RN-52  [RN-52]  182.63,172.97 0 top
U26  BLUETOOTH-RN-52  [RN-52]  218.69,172.97 0 top
U27  BLUETOOTH-RN-52  [RN-52]  254.76,172.97 0 top
U28  BLUETOOTH-RN-52  [RN-52]  290.83,172.97 0 top
U29  BLUETOOTH-RN-52  [RN-52]  182.63,228.85 0 top
U30  BLUETOOTH-RN-52  [RN-52]  218.69,228.85 0 top
U31  BLUETOOTH-RN-52  [RN-52]  254.76,228.85 0 top
U32  BLUETOOTH-RN-52  [RN-52]  290.83,228.85 0 top

## Library data of the parts
D1 D3 D5 D7 D9 D11 D13 D15 D17 D19 D21 D23 D25 D27 D29 D31 D33 D35 D37 D39 D41 D43 D45 D47 D49 D51 D53 D55 D57 D59 D61 D63 = SparkFun-LED; PROD_ID: DIO-00821
D2 D4 D6 D8 D10 D12 D14 D16 D18 D20 D22 D24 D26 D28 D30 D32 D34 D36 D38 D40 D42 D44 D46 D48 D50 D52 D54 D56 D58 D60 D62 D64 = SparkFun-LED; PROD_ID: DIO-00819
E$1-E$76 LOGO1-LOGO96 = SparkFun-Aesthetics
JP1-JP64 = SparkFun-Connectors
R1-R64 = SparkFun-Resistors
STANDOFF1-STANDOFF64 = SparkFun-Electromechanical
U1-U32 = SparkFun-RF